# EAGLE board board-Panel (EAGLE 9.6.2)
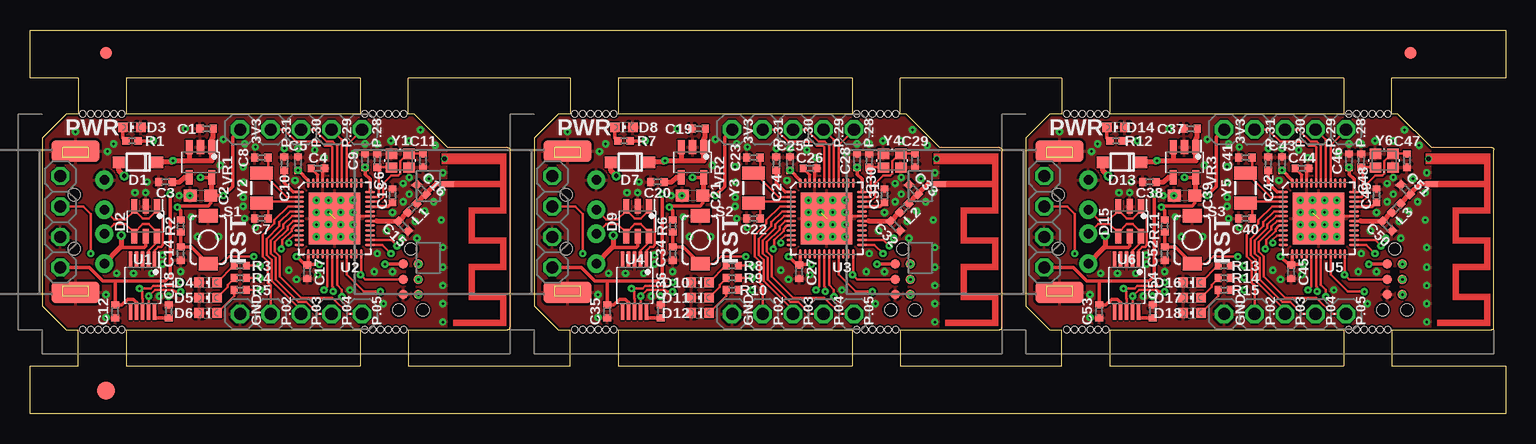
[diagram p0: board, top side]
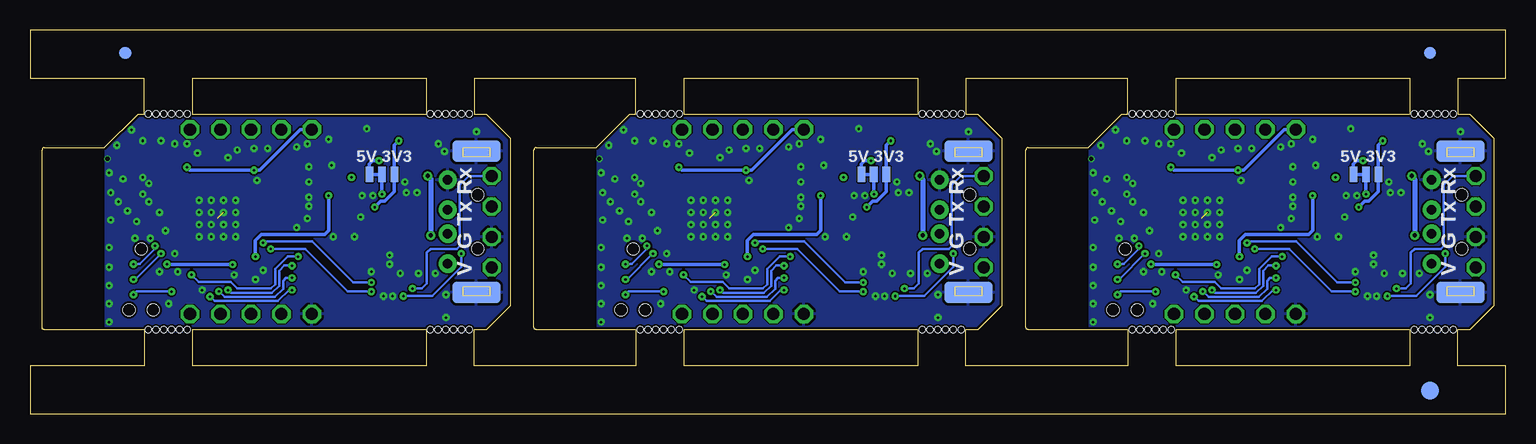
[diagram p1: board, bottom side, seen from below]

Size 123 x 32 mm. Coordinates in mm from the lower left corner, seen from the top.
Outline: 82,4 72.5,4 72.5,7 80.8,7 arc90 81,7.2 81,22 arc90 80.8,22.2 75.8,22.2 73,25 72.5,25 72.5,28 82,28
Outline: 82,0 41,0 0,0 0,4 4,4 4,7 3,7 1,9 1,23 3,25 4,25 4,28 0,28 0,32 41,32 82,32
Outline: 82,4 86,4 86,7 85,7 83,9 83,23 85,25 86,25 86,28 82,28
Outline: 82,0 123,0 123,4 113.5,4 113.5,7 121.8,7 arc90 122,7.2 122,22 arc90 121.8,22.2 116.8,22.2 114,25 113.5,25 113.5,28 123,28 123,32 82,32
Outline: 8,7 27.5,7 27.5,4 8,4 8,7
Outline: 31.5,7 39.8,7 arc90 40,7.2 40,22 arc90 39.8,22.2 34.8,22.2 32,25 31.5,25 31.5,28 41,28 45,28 45,25 44,25 42,23 42,9 44,7 45,7 45,4 41,4 31.5,4 31.5,7
Outline: 27.5,25 8,25 8,28 27.5,28 27.5,25
Outline: 49,7 68.5,7 68.5,4 49,4 49,7
Outline: 68.5,25 49,25 49,28 68.5,28 68.5,25
Outline: 90,7 109.5,7 109.5,4 90,4 90,7
Outline: 109.5,25 90,25 90,28 109.5,28 109.5,25
Copper layers (1*16): Top 0.035mm / dielectric 1.5mm / Bottom 0.035mm
Design rules "board": minimum track width 0.13208125mm, minimum drill 0.2mm, track to track 0.13208125mm, track to pad 0.13208125mm, pad to pad 0.13208125mm, via to via 0.13208125mm, smd to smd 0.13208125mm, copper to edge 8mil, drill to drill 3mil, minimum pad ring 3mil, minimum via ring 0.2mm, stop-mask expansion 4mil, vias tented up to drill 15mil, thermal gap 8mil
Net classes: 0 default: width 0.203 mm; 1 power: width 0.305 mm; 2 RF: width 0.406 mm
Holes 0.5 mm at 4.4,25 5.05,25 5.7,25 6.35,25 7,25 7.65,25 27.9,25 28.55,25 29.2,25 29.85,25 30.5,25 31.15,25 27.9,7 28.55,7 29.2,7 29.85,7 30.5,7 31.15,7 4.4,7 5.05,7 5.7,7 6.35,7 7,7 7.65,7 45.4,25 46.05,25 46.7,25 47.35,25 48,25 48.65,25 68.9,25 69.55,25 70.2,25 70.85,25 71.5,25 72.15,25 68.9,7 69.55,7 70.2,7 70.85,7 71.5,7 72.15,7 45.4,7 46.05,7 46.7,7 47.35,7 48,7 48.65,7 86.4,25 87.05,25 87.7,25 88.35,25 89,25 89.65,25 109.9,25 110.55,25 111.2,25 111.85,25 112.5,25 113.15,25 109.9,7 110.55,7 111.2,7 111.85,7 112.5,7 113.15,7 86.4,7 87.05,7 87.7,7 88.35,7 89,7 89.65,7

## Footprints (pad centres in the part's own frame; a part is rotated, then mirrored left to right if it is on the bottom)
C0402 = smd 0.6 x 0.65: 1 -0.551,0; 2 0.551,0
C0603 = smd 1.1 x 1: 1 -0.85,0; 2 0.85,0
SOD-123 = smd 0.988 x 0.95: A 1.6,0; C -1.6,0
SPT-23-6 = smd 1.209 x 0.51: 1 -1.253,0.95; 2 -1.253,0; 3 -1.253,-0.95; 4 1.253,-0.95; 5 1.253,0; 6 1.253,0.95
LED_0603 = smd 0.8 x 0.8: A 0.75,0; C -0.75,0
FIDUCIAL-1X2 = smd 1 x 1: 1 0,0
FIDUCIAL-1.5X3 = smd 1.5 x 1.5: 1 0,0
USB-A-H-RECT = drill 0.8 pad 1.524: D+ 2.4,1; D- 2.4,-1; GND 2.4,3.5; VBUS 2.4,-3.5 | smd 4 x 1.8: SHIELD@0 0,5.9; SHIELD@1 0,-5.9 | smd 4 x 1.8 bottom: SHIELD@2 0,5.9; SHIELD@3 0,-5.9 | hole 1: -0.1,2.25; -0.1,-2.25
1X04-NOSILK = drill 1.016 octagon: 1 -3.81,0; 2 -1.27,0; 3 1.27,0; 4 3.81,0
SMT-JUMPER_3_1-NC_TRACE_NO-SILK = smd 0.66 x 1.27: 1 -1.041,0; 2 0,0; 3 1.041,0
1X05-NOSILK = drill 1.016 octagon: 1 -5.08,0; 2 -2.54,0; 3 0,0; 4 2.54,0; 5 5.08,0
R0402 = smd 0.6 x 0.65: 1 -0.5,0; 2 0.5,0
TACTILE_SWITCH_SMD_3.0X4.0MM = smd 1.1 x 1.6: 1 -2,0; 2 2,0
TC2030-IDC-NL = smd 0.787 x 0.787: 1 -1.27,-0.635; 2 -1.27,0.635; 3 0,-0.635; 4 0,0.635; 5 1.27,-0.635; 6 1.27,0.635 | hole 0.991: -2.54,0; 2.54,1.016; 2.54,-1.016
MSOP-10 = smd 1.412 x 0.272: 1 -2.15,1; 2 -2.15,0.5; 3 -2.15,0; 4 -2.15,-0.5; 5 -2.15,-1; 6 2.15,-1; 7 2.15,-0.5; 8 2.15,0; 9 2.15,0.5; 10 2.15,1
QFN40P600X600X90-49T450N = smd 0.811 x 0.22: 1 -2.951,2.2; 2 -2.951,1.8; 3 -2.951,1.4; 4 -2.951,1; 5 -2.951,0.6; 6 -2.951,0.2; 7 -2.951,-0.2; 8 -2.951,-0.6; 9 -2.951,-1; 10 -2.951,-1.4; 11 -2.951,-1.8; 12 -2.951,-2.2; 25 2.951,-2.2; 26 2.951,-1.8; 27 2.951,-1.4; 28 2.951,-1; 29 2.951,-0.6; 30 2.951,-0.2; 31 2.951,0.2; 32 2.951,0.6; 33 2.951,1; 34 2.951,1.4; 35 2.951,1.8; 36 2.951,2.2 | smd 0.22 x 0.811: 13 -2.2,-2.951; 14 -1.8,-2.951; 15 -1.4,-2.951; 16 -1,-2.951; 17 -0.6,-2.951; 18 -0.2,-2.951; 19 0.2,-2.951; 20 0.6,-2.951; 21 1,-2.951; 22 1.4,-2.951; 23 1.8,-2.951; 24 2.2,-2.951; 37 2.2,2.951; 38 1.8,2.951; 39 1.4,2.951; 40 1,2.951; 41 0.6,2.951; 42 0.2,2.951; 43 -0.2,2.951; 44 -0.6,2.951; 45 -1,2.951; 46 -1.4,2.951; 47 -1.8,2.951; 48 -2.2,2.951 | smd 4.3 x 4.3: 49 0,0
TI-AN043_LEFT = drill 0.35: GND 0.45,0.25 | smd 0.508 x 1.016: RF 2.55,0.51
SOT-23-5 = smd 1.189 x 0.589: 1 -1.264,0.95; 2 -1.264,0; 3 -1.264,-0.95; 4 1.264,-0.95; 5 1.264,0.95
CRYSTAL-SMD-2.0X1.6MM = smd 0.95 x 0.85: 1 -0.725,-0.575; 2 0.725,-0.575; 3 0.725,0.575; 4 -0.725,0.575
CRYSTAL-SMD-3.2X1.5MM = smd 1.1 x 1.9: P$1 -1.25,0; P$2 1.25,0

## Placement (x,y rotation side)
C1  1uF  [C0402]  14.72,23.76 180 top
C2  2.2uF  [C0603]  14.21,18.18 180 top
C3  100nF  [C0402]  11.29,19.32 180 top
C4  100nF  [C0402]  23.99,20.46 0 top
C5  4.7uF  [C0402]  22.34,20.84 90 top
C6  12pF  [C0402]  28.94,21.1 90 top
C7  12pF  [C0402]  19.29,16.27 0 top
C8  12pF  [C0402]  19.29,21.35 0 top
C9  100nF  [C0402]  27.92,21.1 90 top
C10  100nF  [C0402]  21.19,20.84 90 top
C11  12pF  [C0402]  32.75,21.1 270 top
C12  100nF  [C0402]  7.1,8.52 270 top
C13  100pF  [C0402]  30.21,18.18 90 top
C14  1uF  [C0402]  12.56,13.35 270 top
C15  DNP  [C0402]  31.1,15.64 315 top
C16  DNP  [C0402]  32.62,18.68 135 top
C17  100nF  [C0402]  23.1,11.83 270 top
C18  100nF  [C0402]  11.56,8.52 90 top
C19  1uF  [C0402]  55.72,23.76 180 top
C20  100nF  [C0402]  52.29,19.32 180 top
C21  2.2uF  [C0603]  55.21,18.18 180 top
C22  12pF  [C0402]  60.29,16.27 0 top
C23  12pF  [C0402]  60.29,21.35 0 top
C24  100nF  [C0402]  62.19,20.84 90 top
C25  4.7uF  [C0402]  63.34,20.84 90 top
C26  100nF  [C0402]  64.99,20.46 0 top
C27  100nF  [C0402]  64.1,11.83 270 top
C28  100nF  [C0402]  68.92,21.1 90 top
C29  12pF  [C0402]  73.75,21.1 270 top
C30  12pF  [C0402]  69.94,21.1 90 top
C31  100pF  [C0402]  71.21,18.18 90 top
C32  DNP  [C0402]  72.1,15.64 315 top
C33  DNP  [C0402]  73.62,18.68 135 top
C34  1uF  [C0402]  53.56,13.35 270 top
C35  100nF  [C0402]  48.1,8.52 270 top
C36  100nF  [C0402]  52.56,8.52 90 top
C37  1uF  [C0402]  96.71,23.76 180 top
C38  100nF  [C0402]  93.29,19.32 180 top
C39  2.2uF  [C0603]  96.21,18.18 180 top
C40  12pF  [C0402]  101.29,16.27 0 top
C41  12pF  [C0402]  101.29,21.35 0 top
C42  100nF  [C0402]  103.19,20.84 90 top
C43  4.7uF  [C0402]  104.33,20.84 90 top
C44  100nF  [C0402]  105.99,20.46 0 top
C45  100nF  [C0402]  105.1,11.83 270 top
C46  100nF  [C0402]  109.92,21.1 90 top
C47  12pF  [C0402]  114.75,21.1 270 top
C48  12pF  [C0402]  110.94,21.1 90 top
C49  100pF  [C0402]  112.21,18.18 90 top
C50  DNP  [C0402]  113.1,15.64 315 top
C51  DNP  [C0402]  114.62,18.68 135 top
C52  1uF  [C0402]  94.56,13.35 270 top
C53  100nF  [C0402]  89.09,8.52 270 top
C54  100nF  [C0402]  93.56,8.52 90 top
D1  B5819W  [SOD-123]  9,20.97 180 top
D2  TVS  [SPT-23-6]  9.64,16.03 270 top
D3  PWR  [LED_0603]  8.49,23.89 180 top
D4  0603  [LED_0603]  14.84,10.94 0 top
D5  0603  [LED_0603]  14.84,9.67 0 top
D6  0603  [LED_0603]  14.84,8.4 0 top
D7  B5819W  [SOD-123]  50,20.97 180 top
D8  PWR  [LED_0603]  49.49,23.89 180 top
D9  TVS  [SPT-23-6]  50.64,16.03 270 top
D10  0603  [LED_0603]  55.84,10.94 0 top
D11  0603  [LED_0603]  55.84,9.67 0 top
D12  0603  [LED_0603]  55.84,8.4 0 top
D13  B5819W  [SOD-123]  91,20.97 180 top
D14  PWR  [LED_0603]  90.49,23.89 180 top
D15  TVS  [SPT-23-6]  91.63,16.03 270 top
D16  0603  [LED_0603]  96.84,10.94 0 top
D17  0603  [LED_0603]  96.84,9.67 0 top
D18  0603  [LED_0603]  96.84,8.4 0 top
E$1  [FIDUCIAL-1X2]  6.35,30.09 0 top
E$2  [FIDUCIAL-1X2]  6.35,30.09 0 bottom
E$3  [FIDUCIAL-1X2]  115.06,30.09 0 top
E$4  [FIDUCIAL-1X2]  115.06,30.09 0 bottom
E$5  [FIDUCIAL-1.5X3]  6.35,1.91 0 top
E$6  [FIDUCIAL-1.5X3]  6.35,1.91 0 bottom
J1  USB-A_PTH_MALE  [USB-A-H-RECT]  3.79,16 0 top
J2  USB-A_PTH_MALE  [USB-A-H-RECT]  44.79,16 0 top
J3  USB-A_PTH_MALE  [USB-A-H-RECT]  85.79,16 0 top
JP1  V G Tx Rx  [1X04-NOSILK]  2.52,16 90 top
JP2  5V 3V3  [SMT-JUMPER_3_1-NC_TRACE_NO-SILK]  11.67,19.95 180 bottom
JP3  [1X05-NOSILK]  22.59,23.7 0 top
JP4  [1X05-NOSILK]  22.59,8.3 0 top
JP5  V G Tx Rx  [1X04-NOSILK]  43.52,16 90 top
JP6  5V 3V3  [SMT-JUMPER_3_1-NC_TRACE_NO-SILK]  52.67,19.95 180 bottom
JP7  [1X05-NOSILK]  63.59,23.7 0 top
JP8  [1X05-NOSILK]  63.59,8.3 0 top
JP9  V G Tx Rx  [1X04-NOSILK]  84.52,16 90 top
JP10  5V 3V3  [SMT-JUMPER_3_1-NC_TRACE_NO-SILK]  93.67,19.95 180 bottom
JP11  [1X05-NOSILK]  104.59,23.7 0 top
JP12  [1X05-NOSILK]  104.59,8.3 0 top
L1  0R  [R0402]  31.86,17.16 45 top
L2  0R  [R0402]  72.86,17.16 45 top
L3  0R  [R0402]  113.86,17.16 45 top
R1  15k  [R0402]  8.49,22.75 0 top
R2  10k  [R0402]  12.56,15.64 90 top
R3  10k  [R0402]  17.51,12.33 180 top
R4  10k  [R0402]  17.51,11.32 180 top
R5  10k  [R0402]  17.51,10.3 180 top
R6  10k  [R0402]  53.56,15.64 90 top
R7  15k  [R0402]  49.49,22.75 0 top
R8  10k  [R0402]  58.51,12.33 180 top
R9  10k  [R0402]  58.51,11.32 180 top
R10  10k  [R0402]  58.51,10.3 180 top
R11  10k  [R0402]  94.56,15.64 90 top
R12  15k  [R0402]  90.49,22.75 0 top
R13  10k  [R0402]  99.51,12.33 180 top
R14  10k  [R0402]  99.51,11.32 180 top
R15  10k  [R0402]  99.51,10.3 180 top
S1  SPST-3x4mm  [TACTILE_SWITCH_SMD_3.0X4.0MM]  14.84,14.49 270 top
S2  SPST-3x4mm  [TACTILE_SWITCH_SMD_3.0X4.0MM]  55.84,14.49 270 top
S3  SPST-3x4mm  [TACTILE_SWITCH_SMD_3.0X4.0MM]  96.84,14.49 270 top
TC1  TC2030-IDC-NL  [TC2030-IDC-NL]  31.73,11.19 270 top
TC2  TC2030-IDC-NL  [TC2030-IDC-NL]  72.73,11.19 270 top
TC3  TC2030-IDC-NL  [TC2030-IDC-NL]  113.73,11.19 270 top
U1  CH340E  [MSOP-10]  9.38,10.68 270 top
U2  NRF52832  [QFN40P600X600X90-49T450N]  25.38,16.27 0 top
U3  NRF52832  [QFN40P600X600X90-49T450N]  66.38,16.27 0 top
U4  CH340E  [MSOP-10]  50.38,10.68 270 top
U5  NRF52832  [QFN40P600X600X90-49T450N]  107.38,16.27 0 top
U6  CH340E  [MSOP-10]  91.38,10.68 270 top
U$1  ANT  [TI-AN043_LEFT]  34.3,21.7 270 top
U$2  ANT  [TI-AN043_LEFT]  75.3,21.7 270 top
U$3  ANT  [TI-AN043_LEFT]  116.3,21.7 270 top
VR1  AP2210K-3.3TRG  [SOT-23-5]  14.21,20.97 270 top
VR2  AP2210K-3.3TRG  [SOT-23-5]  55.21,20.97 270 top
VR3  AP2210K-3.3TRG  [SOT-23-5]  96.21,20.97 270 top
Y1  32MHz_2016  [CRYSTAL-SMD-2.0X1.6MM]  30.84,21.1 180 top
Y2  32.768kHz  [CRYSTAL-SMD-3.2X1.5MM]  19.29,18.81 90 top
Y3  32.768kHz  [CRYSTAL-SMD-3.2X1.5MM]  60.29,18.81 90 top
Y4  32MHz_2016  [CRYSTAL-SMD-2.0X1.6MM]  71.85,21.1 180 top
Y5  32.768kHz  [CRYSTAL-SMD-3.2X1.5MM]  101.29,18.81 90 top
Y6  32MHz_2016  [CRYSTAL-SMD-2.0X1.6MM]  112.84,21.1 180 top

## Library data of the parts
C1 C14 C19 C34 C37 C52 = angrypig7-RCL; LCSC: C52923; SPICEPREFIX: C
C2 C21 C39 = angrypig7-RCL; LCSC: C23630; SPICEPREFIX: C
C3 C4 C9 C10 C12 C17 C18 C20 C24 C26-C28 C35 C36 C38 C42 C44-C46 C53 C54 = angrypig7-RCL; LCSC: C1525; SPICEPREFIX: C
C5 C25 C43 = angrypig7-RCL; LCSC: C23733; SPICEPREFIX: C
C6-C8 C11 C22 C23 C29 C30 C40 C41 C47 C48 = angrypig7-RCL; LCSC: C1547; SPICEPREFIX: C
C13 C31 C49 = angrypig7-RCL; LCSC: C1546; SPICEPREFIX: C
C15 C16 C32 C33 C50 C51 = angrypig7-RCL; SPICEPREFIX: C
D1 D7 D13 = angrypig7-Diodes; LCSC: C8598
D2 D9 D15 = angrypig7-Diodes; JLC_ROTATION: 180; LCSC: C85364
D3 D8 D14 = angrypig7-Diodes; LCSC: C72038
D4-D6 D10-D12 D16-D18 = angrypig7-Diodes; LCSC: C2286
E$1-E$4 = SparkFun-Aesthetics
E$5 E$6 = SparkFun-Retired
J1-J3 = angrypig7-Connectors-USB; LCSC: C98125
JP1 JP3-JP5 JP7-JP9 JP11 JP12 = angrypig7-Connectors-PinHeads
JP2 JP6 JP10 = angrypig7-Jumpers
L1-L3 = angrypig7-RCL; LCSC: C17168
R1 R7 R12 = angrypig7-RCL; LCSC: C25756; SPICEPREFIX: R
R2-R6 R8-R11 R13-R15 = angrypig7-RCL; LCSC: C25744; SPICEPREFIX: R
S1-S3 = angrypig7-Switches; LCSC: C720477
TC1-TC3 = angrypig7-Connectors-Programming
U1 U4 U6 = angrypig7-IC; JLC_ROTATION: 270; LCSC: C99652
U2 U3 U5 = angrypig7-IC-MCU; JLC_ROTATION: 270; LCSC: C77540
U$1-U$3 = angrypig7-Antennas
VR1-VR3 = angrypig7-IC-Power; JLC_ROTATION: 180; LCSC: C176959
Y1 Y4 Y6 = angrypig7-Clocks; LCSC: C255896
Y2 Y3 Y5 = angrypig7-Clocks; LCSC: C32346

## Nets
3V1 [power]: C21.1 C25.1 C27.1 C28.1 JP6.1 JP7.1 R6.2 R7.2 TC2.1 U3.13 U3.36 U3.48 VR2.5
3V2 [power]: C39.1 C43.1 C45.1 C46.1 JP10.1 JP11.1 R11.2 R12.2 TC3.1 U5.13 U5.36 U5.48 VR3.5
3V3 [power]: C2.1 C5.1 C9.1 C17.1 JP2.1 JP3.1 R1.2 R2.2 TC1.1 U2.13 U2.36 U2.48 VR1.5
5V: C1.1 D1.C JP2.3 VR1.1 VR1.3
5V1: C19.1 D7.C JP6.3 VR2.1 VR2.3
5V2: C37.1 D13.C JP10.3 VR3.1 VR3.3
GND [power]: C1.2 C2.2 C3.2 C4.2 C5.2 C6.2 C7.1 C8.1 C9.2 C10.2 C11.2 C12.2 C13.2 C14.2 C15.2 C16.2 C17.2 C18.2 D2.2 D3.C D4.C D5.C D6.C J1.GND J1.SHIELD@0 J1.SHIELD@1 J1.SHIELD@2 J1.SHIELD@3 JP1.2 JP4.1 S1.1 TC1.5 U1.3 U2.31 U2.45 U2.49 U$1.GND VR1.2 Y1.2 Y1.4
GND1 [power]: C19.2 C20.2 C21.2 C22.1 C23.1 C24.2 C25.2 C26.2 C27.2 C28.2 C29.2 C30.2 C31.2 C32.2 C33.2 C34.2 C35.2 C36.2 D8.C D9.2 D10.C D11.C D12.C J2.GND J2.SHIELD@0 J2.SHIELD@1 J2.SHIELD@2 J2.SHIELD@3 JP5.2 JP8.1 S2.1 TC2.5 U3.31 U3.45 U3.49 U4.3 U$2.GND VR2.2 Y4.2 Y4.4
GND2 [power]: C37.2 C38.2 C39.2 C40.1 C41.1 C42.2 C43.2 C44.2 C45.2 C46.2 C47.2 C48.2 C49.2 C50.2 C51.2 C52.2 C53.2 C54.2 D14.C D15.2 D16.C D17.C D18.C J3.GND J3.SHIELD@0 J3.SHIELD@1 J3.SHIELD@2 J3.SHIELD@3 JP9.2 JP12.1 S3.1 TC3.5 U5.31 U5.45 U5.49 U6.3 U$3.GND VR3.2 Y6.2 Y6.4
LED1: R3.1 U2.17
LED2: R4.1 U2.18
LED3: R5.1 U2.19
LED4: R8.1 U3.17
LED5: R9.1 U3.18
LED6: R10.1 U3.19
LED7: R13.1 U5.17
LED8: R14.1 U5.18
LED9: R15.1 U5.19
N$1: C8.2 U2.2 Y2.P$2
N$2: D4.A R3.2
N$3 [power]: C3.1 VR1.4
N$4: C7.2 U2.3 Y2.P$1
N$5 [power]: C10.1 U2.1
N$6: D3.A R1.1
N$7 [power]: C4.1 U2.46
N$8: C6.1 U2.35 Y1.3
N$9: C11.1 U2.34 Y1.1
N$10 [power]: C13.1 U2.33
N$11: U2.32
N$12: D5.A R4.2
N$13 [power]: C20.1 VR2.4
N$14: D6.A R5.2
N$15: C23.2 U3.2 Y3.P$2
N$16 [power]: C18.1 U1.10
N$17: C22.2 U3.3 Y3.P$1
N$18 [power]: C24.1 U3.1
N$19 [power]: C26.1 U3.46
N$20: C30.1 U3.35 Y4.3
N$21: C29.1 U3.34 Y4.1
N$22 [power]: C31.1 U3.33
N$23: U3.32
N$24: D8.A R7.1
N$25 [power]: C36.1 U4.10
N$26: D10.A R8.2
N$27: D11.A R9.2
N$28: D12.A R10.2
N$29 [power]: C38.1 VR3.4
N$30: C41.2 U5.2 Y5.P$2
N$31: C40.2 U5.3 Y5.P$1
N$32 [power]: C42.1 U5.1
N$33 [power]: C44.1 U5.46
N$34: C48.1 U5.35 Y6.3
N$35: C47.1 U5.34 Y6.1
N$36 [power]: C49.1 U5.33
N$37: U5.32
N$38: D14.A R12.1
N$39 [power]: C54.1 U6.10
N$40: D16.A R13.2
N$41: D17.A R14.2
N$42: D18.A R15.2
NRST: C14.1 R2.1 S1.2 TC1.3 U2.24
NRST1: C34.1 R6.1 S2.2 TC2.3 U3.24
NRST2: C52.1 R11.1 S3.2 TC3.3 U5.24
P0.01: JP8.2 U3.4
P0.02: JP4.2 U2.4
P0.03: JP4.3 U2.5
P0.04: JP4.4 U2.6
P0.05: JP4.5 U2.7
P0.06: JP7.2 U3.43
P0.07: JP7.3 U3.42
P0.08: JP7.4 U3.41
P0.09: JP7.5 U3.40
P0.10: JP8.3 U3.5
P0.11: JP8.4 U3.6
P0.12: JP8.5 U3.7
P0.13: JP12.2 U5.4
P0.14: JP11.2 U5.43
P0.15: JP11.3 U5.42
P0.16: JP11.4 U5.41
P0.17: JP11.5 U5.40
P0.18: JP12.3 U5.5
P0.19: JP12.4 U5.6
P0.20: JP12.5 U5.7
P0.28: JP3.5 U2.40
P0.29: JP3.4 U2.41
P0.30: JP3.3 U2.42
P0.31: JP3.2 U2.43
RF-1 [RF]: C15.1 L1.1 U2.30
RF-2 [RF]: C16.1 L1.2 U$1.RF
RF-3 [RF]: C33.1 L2.2 U$2.RF
RF-4 [RF]: C32.1 L2.1 U3.30
RF-5 [RF]: C51.1 L3.2 U$3.RF
RF-6 [RF]: C50.1 L3.1 U5.30
SWDCLK: TC1.4 U2.25
SWDCLK1: TC2.4 U3.25
SWDCLK2: TC3.4 U5.25
SWDIO: TC1.2 U2.26
SWDIO1: TC2.2 U3.26
SWDIO2: TC3.2 U5.26
SWO: TC1.6 U2.21
SWO1: TC2.6 U3.21
SWO2: TC3.6 U5.21
UART_RX: JP1.4 U1.8 U2.10
UART_RX1: JP5.4 U3.10 U4.8
UART_RX2: JP9.4 U5.10 U6.8
UART_TX: JP1.3 U1.9 U2.8
UART_TX1: JP5.3 U3.8 U4.9
UART_TX2: JP9.3 U5.8 U6.9
USB_IN [power]: D1.A D2.5 J1.VBUS
USB_IN1 [power]: D7.A D9.5 J2.VBUS
USB_IN2 [power]: D13.A D15.5 J3.VBUS
USB_N: D2.4 D2.6 J1.D- U1.2
USB_N1: D9.4 D9.6 J2.D- U4.2
USB_N2: D15.4 D15.6 J3.D- U6.2
USB_P: D2.1 D2.3 J1.D+ U1.1
USB_P1: D9.1 D9.3 J2.D+ U4.1
USB_P2: D15.1 D15.3 J3.D+ U6.1
VCCIO [power]: C12.1 JP1.1 JP2.2 U1.7
VCCIO1 [power]: C35.1 JP5.1 JP6.2 U4.7
VCCIO2 [power]: C53.1 JP9.1 JP10.2 U6.7

## Tracks (layer width: path | path; a pad name or v marks a point on that pad's centre or on a via)
3V1  (via drill 0.2)
  Top 0.254: 64.18,19.44 U3.48
  Top 0.305: v55.21,19.7 VR2.5 | R6.2 53.56,16.93 v53.27,17.22 53.38,17.33 55.84,17.33 56.06,17.54 C21.1 | U3.36 69.34,19.54 68.92,19.95 C28.1 | TC2.1 v70.58,12.46 | JP7.1 57.88,23.06 57.88,18.94 v57.11,18.18 56.26,18.18 56.16,18.28 | C25.1 64.18,19.44 | v51.27,22.75 R7.2 | v65.11,12.43 64.15,12.43 C27.1 | U3.13 64.18,12.46 C27.1 | C27.1 63.93,12.38 v63.21,13.1
  Top 0.406: C21.1 56.16,18.28 VR2.5
  Bottom 0.305: v70.58,12.46 70.55,12.43 v65.11,12.43 | JP7.1 59.46,23.7 62.87,20.29 C25.1 68.67,20.29 C28.1 | v57.11,18.18 57.11,15.25 57.44,14.92 62.72,14.92 63.21,14.43 v63.21,13.1 | v53.27,17.22 52.77,17.72 52.43,17.72 51.63,18.52 JP6.1 51.63,22.39 v51.27,22.75
  other vias: 63.34,20.29 68.92,20.55
3V2  (via drill 0.2)
  Top 0.254: 105.18,19.44 U5.48
  Top 0.305: v96.21,19.7 VR3.5 | R11.2 94.56,16.93 v94.27,17.22 94.38,17.33 96.84,17.33 97.06,17.54 C39.1 | U5.36 110.33,19.54 109.92,19.95 C46.1 | TC3.1 v111.57,12.46 | JP11.1 98.87,23.06 98.87,18.94 v98.11,18.18 97.26,18.18 97.16,18.28 | C43.1 105.18,19.44 | v92.27,22.75 R12.2 | v106.11,12.43 105.15,12.43 C45.1 | U5.13 105.18,12.46 C45.1 | C45.1 104.93,12.38 v104.21,13.1
  Top 0.406: C39.1 97.16,18.28 VR3.5
  Bottom 0.305: v111.57,12.46 111.54,12.43 v106.11,12.43 | JP11.1 100.46,23.7 103.87,20.29 C43.1 109.67,20.29 C46.1 | v98.11,18.18 98.11,15.25 98.44,14.92 103.71,14.92 104.21,14.43 v104.21,13.1 | v94.27,17.22 93.77,17.72 93.42,17.72 92.63,18.52 JP10.1 92.63,22.39 v92.27,22.75
  other vias: 104.33,20.29 109.92,20.55
3V3  (via drill 0.2)
  Top 0.254: 23.18,19.44 U2.48
  Top 0.305: v14.21,19.7 VR1.5 | R2.2 12.56,16.93 v12.27,17.22 12.38,17.33 14.84,17.33 15.06,17.54 C2.1 | U2.36 28.33,19.54 27.92,19.95 C9.1 | TC1.1 v29.58,12.46 | JP3.1 16.88,23.06 16.88,18.94 v16.11,18.18 15.26,18.18 15.16,18.28 | C5.1 23.18,19.44 | v10.27,22.75 R1.2 | v24.11,12.43 23.15,12.43 C17.1 | U2.13 23.18,12.46 C17.1 | C17.1 22.93,12.38 v22.21,13.1
  Top 0.406: C2.1 15.16,18.28 VR1.5
  Bottom 0.305: v29.58,12.46 29.55,12.43 v24.11,12.43 | JP3.1 18.46,23.7 21.87,20.29 C5.1 27.67,20.29 C9.1 | v16.11,18.18 16.11,15.25 16.44,14.92 21.72,14.92 22.21,14.43 v22.21,13.1 | v12.27,17.22 11.77,17.72 11.43,17.72 10.63,18.52 JP2.1 10.63,22.39 v10.27,22.75
  other vias: 22.34,20.29 27.92,20.55
5V  (via drill 0.2)
  Top 0.406: VR1.3 13.26,21.1 | D1.C 11.8,20.97 v11.92,21.1 13.26,21.1 | 13.26,21.1 15.16,21.1 VR1.1 15.16,22.94 15.27,23.04 C1.1
  Bottom 0.305: JP2.3 12.71,20.82 12.43,21.1 v11.92,21.1
5V1  (via drill 0.2)
  Top 0.406: VR2.3 54.26,21.1 | D7.C 52.8,20.97 v52.92,21.1 54.26,21.1 | 54.26,21.1 56.16,21.1 VR2.1 56.16,22.94 56.27,23.04 C19.1
  Bottom 0.305: JP6.3 53.71,20.82 53.43,21.1 v52.92,21.1
5V2  (via drill 0.2)
  Top 0.406: VR3.3 95.26,21.1 | D13.C 93.79,20.97 v93.92,21.1 95.26,21.1 | 95.26,21.1 97.16,21.1 VR3.1 97.16,22.94 97.27,23.04 C37.1
  Bottom 0.305: JP10.3 94.71,20.82 94.43,21.1 v93.92,21.1
GND  (via drill 0.2)  (1 unrouted)
  Top 0.229: U2.31 27.22,16.47
  Top 0.254: U2.45 24.38,20.31
  Top 0.305: 24.38,20.31 C4.2
  Top 0.406: 27.22,16.47 v26.91,16.78
  other vias: 12.56,11.83 11.03,12.46 11.03,13.22 8.62,11.7 10.14,11.7 10.78,9.79 6.33,9.92 6.33,8.02 9.64,18.43 8.75,18.43 15.86,20.72 16.11,22.88 12.94,23.76 9.76,19.32 13.45,16.4 13.95,14.75 15.73,14.75 6.97,22.49 11.54,9.79 21.19,22.11 22.34,22.11 24.49,21.35 34.4,7.63 34.4,9.16 34.4,10.68 34.4,12.21 34.4,13.86 34.27,16.14 34.27,18.43 34.4,20.08 32.54,23.66 25.89,17.8 24.88,17.8 23.86,17.8 26.91,17.8 25.89,14.75 24.88,14.75 23.86,14.75 26.91,14.75 25.89,15.76 24.88,15.76 23.86,15.76 26.91,15.76 25.89,16.78 24.88,16.78 23.86,16.78 31.1,19.19 33.26,19.57 27.92,22.49 27.04,21.73 28.94,22.49 30.08,22.75 31.61,22.75 29.45,9.16 26.65,10.3 17.89,16.27 18.78,15.51 18.78,22.24 17.76,20.59 17.76,19.32 17.76,18.05 17.76,17.29 31.61,19.7 31.1,17.67 29.7,15.26 33.64,17.67 23.73,21.99 28.94,13.35 30.21,11.83 28.69,11.83 33.77,22.37 3.79,23.51 6.46,21.86 32.12,16.02 30.21,16.78 31.61,18.3 32.88,16.91 30.97,14.62 32.24,14.62 22.08,19.45 17.89,22.49 7.22,11.7 22.21,11.19 23.99,11.57 21.57,11.95 12.43,18.18 13.32,18.18
  pour Top (rank 6): 1,25 40,25 40,7 1,7
  pour Bottom (rank 6): 1,25 40,25 40,7 1,7
GND1  (via drill 0.2)  (1 unrouted)
  Top 0.229: U3.31 68.22,16.47
  Top 0.254: U3.45 65.38,20.31
  Top 0.305: 65.38,20.31 C26.2
  Top 0.406: 68.22,16.47 v67.91,16.78
  other vias: 53.56,11.83 52.03,12.46 52.03,13.22 49.62,11.7 51.14,11.7 51.78,9.79 47.33,9.92 47.33,8.02 50.64,18.43 49.75,18.43 56.86,20.72 57.11,22.88 53.94,23.76 50.76,19.32 54.45,16.4 54.95,14.75 56.73,14.75 47.97,22.49 52.54,9.79 62.19,22.11 63.34,22.11 65.5,21.35 75.4,7.63 75.4,9.16 75.4,10.68 75.4,12.21 75.4,13.86 75.27,16.14 75.27,18.43 75.4,20.08 73.54,23.66 66.89,17.8 65.88,17.8 64.86,17.8 67.91,17.8 66.89,14.75 65.88,14.75 64.86,14.75 67.91,14.75 66.89,15.76 65.88,15.76 64.86,15.76 67.91,15.76 66.89,16.78 65.88,16.78 64.86,16.78 72.1,19.19 74.26,19.57 68.92,22.49 68.04,21.73 69.94,22.49 71.08,22.75 72.61,22.75 70.45,9.16 67.65,10.3 58.89,16.27 59.78,15.51 59.78,22.24 58.76,20.59 58.76,19.32 58.76,18.05 58.76,17.29 72.61,19.7 72.1,17.67 70.7,15.26 74.64,17.67 64.73,21.99 69.94,13.35 71.21,11.83 69.69,11.83 74.77,22.37 44.79,23.51 47.46,21.86 73.12,16.02 71.21,16.78 72.61,18.3 73.88,16.91 71.97,14.62 73.24,14.62 63.08,19.45 58.89,22.49 48.22,11.7 63.21,11.19 64.99,11.57 62.57,11.95 53.43,18.18 54.32,18.18
  pour Top (rank 6): 42,25 81,25 81,7 42,7
  pour Bottom (rank 6): 42,25 81,25 81,7 42,7
GND2  (via drill 0.2)  (1 unrouted)
  Top 0.229: U5.31 109.22,16.47
  Top 0.254: U5.45 106.38,20.31
  Top 0.305: 106.38,20.31 C44.2
  Top 0.406: 109.22,16.47 v108.91,16.78
  other vias: 94.56,11.83 93.03,12.46 93.03,13.22 90.62,11.7 92.14,11.7 92.78,9.79 88.33,9.92 88.33,8.02 91.63,18.43 90.75,18.43 97.86,20.72 98.11,22.88 94.94,23.76 91.76,19.32 95.44,16.4 95.95,14.75 97.73,14.75 88.97,22.49 93.54,9.79 103.19,22.11 104.33,22.11 106.49,21.35 116.4,7.63 116.4,9.16 116.4,10.68 116.4,12.21 116.4,13.86 116.27,16.14 116.27,18.43 116.4,20.08 114.54,23.66 107.89,17.8 106.87,17.8 105.86,17.8 108.91,17.8 107.89,14.75 106.87,14.75 105.86,14.75 108.91,14.75 107.89,15.76 106.87,15.76 105.86,15.76 108.91,15.76 107.89,16.78 106.87,16.78 105.86,16.78 113.1,19.19 115.26,19.57 109.92,22.49 109.03,21.73 110.94,22.49 112.08,22.75 113.61,22.75 111.45,9.16 108.65,10.3 99.89,16.27 100.78,15.51 100.78,22.24 99.76,20.59 99.76,19.32 99.76,18.05 99.76,17.29 113.61,19.7 113.1,17.67 111.7,15.26 115.64,17.67 105.73,21.99 110.94,13.35 112.21,11.83 110.68,11.83 115.76,22.37 85.79,23.51 88.46,21.86 114.11,16.02 112.21,16.78 113.61,18.3 114.88,16.91 112.97,14.62 114.24,14.62 104.08,19.45 99.89,22.49 89.22,11.7 104.21,11.19 105.99,11.57 103.57,11.95 94.43,18.18 95.32,18.18
  pour Top (rank 6): 83,25 122,25 122,7 83,7
  pour Bottom (rank 6): 83,25 122,25 122,7 83,7
GND-CUTOUT
  cutout Top: 40,25 34.8,25 34.8,7 40,7
GND-CUTOUT1
  cutout Top: 81,25 75.8,25 75.8,7 81,7
GND-CUTOUT2
  cutout Bottom: 40,25 34.8,25 34.8,7 40,7
GND-CUTOUT3
  cutout Bottom: 81,25 75.8,25 75.8,7 81,7
GND-CUTOUT4
  cutout Top: 122,25 116.8,25 116.8,7 122,7
GND-CUTOUT5
  cutout Bottom: 122,25 116.8,25 116.8,7 122,7
LED1  (via drill 0.2)
  Top 0.203: R3.1 v19.16,12.33 | U2.17 24.78,10.59 v24.5,10.3
  Bottom 0.203: v19.16,12.33 19.8,12.33 20.24,11.89 20.24,10.65 20.84,10.05 24.24,10.05 v24.5,10.3
LED2  (via drill 0.2)
  Top 0.203: R4.1 v19.16,11.32 | U2.18 25.18,10.62 25.28,10.52 25.28,10.21 v25.27,10.19
  Bottom 0.203: v19.16,11.32 19.67,11.32 19.91,11.08 19.91,10.41 20.61,9.71 24.79,9.71 v25.27,10.19
LED3  (via drill 0.2)
  Top 0.203: R5.1 v19.16,10.3 | U2.19 25.58,10.73 25.99,10.32 v25.99,9.75
  Bottom 0.203: v25.99,9.75 25.62,9.38 20.34,9.38 19.42,10.3 v19.16,10.3
LED4  (via drill 0.2)
  Top 0.203: R8.1 v60.16,12.33 | U3.17 65.78,10.59 v65.5,10.3
  Bottom 0.203: v60.16,12.33 60.8,12.33 61.24,11.89 61.24,10.65 61.84,10.05 65.24,10.05 v65.5,10.3
LED5  (via drill 0.2)
  Top 0.203: R9.1 v60.16,11.32 | U3.18 66.18,10.62 66.28,10.52 66.28,10.21 v66.27,10.19
  Bottom 0.203: v60.16,11.32 60.67,11.32 60.91,11.08 60.91,10.41 61.61,9.71 65.79,9.71 v66.27,10.19
LED6  (via drill 0.2)
  Top 0.203: R10.1 v60.16,10.3 | U3.19 66.58,10.73 66.99,10.32 v66.99,9.75
  Bottom 0.203: v66.99,9.75 66.62,9.38 61.34,9.38 60.42,10.3 v60.16,10.3
LED7  (via drill 0.2)
  Top 0.203: R13.1 v101.16,12.33 | U5.17 106.78,10.59 v106.49,10.3
  Bottom 0.203: v101.16,12.33 101.8,12.33 102.24,11.89 102.24,10.65 102.84,10.05 106.24,10.05 v106.49,10.3
LED8  (via drill 0.2)
  Top 0.203: R14.1 v101.16,11.32 | U5.18 107.18,10.62 107.28,10.52 107.28,10.21 v107.27,10.19
  Bottom 0.203: v101.16,11.32 101.67,11.32 101.91,11.08 101.91,10.41 102.6,9.71 106.79,9.71 v107.27,10.19
LED9  (via drill 0.2)
  Top 0.203: R15.1 v101.16,10.3 | U5.19 107.58,10.73 107.99,10.32 v107.99,9.75
  Bottom 0.203: v107.99,9.75 107.61,9.38 102.34,9.38 101.41,10.3 v101.16,10.3
N$1
  Top 0.203: U2.2 21.41,18.07 19.42,20.06 Y2.P$2 19.84,20.61 C8.2
N$2
  Top 0.203: D4.A 16.99,12.33 R3.2
N$3
  Top 0.406: C3.1 12.49,19.32 12.88,19.71 VR1.4
N$4
  Top 0.203: U2.3 19.4,17.67 Y2.P$1 19.84,17.01 C7.2
N$5
  Top 0.254: U2.1 21.93,18.47
  Top 0.305: C10.1 21.19,19.21 21.93,18.47
N$6
  Top 0.305: R1.1 7.74,23 D3.A
N$7
  Top 0.254: U2.46 23.98,19.91 C4.1
N$8
  Top 0.203: U2.35 28.96,18.07 29.07,18.18 29.07,20.42 C6.1 30.1,20.55 Y1.3
N$9
  Top 0.203: C11.1 32.73,21.67 Y1.1 31.49,21.67 30.86,21.04 30.86,20.03 30.69,19.86 30.12,19.86 29.45,19.19 29.45,18.08 29.04,17.67 U2.34
N$10
  Top 0.254: U2.33 29.17,17.27
  Top 0.305: 29.17,17.27 29.86,17.27 C13.1
N$12
  Top 0.203: D5.A 16.48,10.55 16.48,10.72 17.01,11.26 R4.2
N$13
  Top 0.406: C20.1 53.49,19.32 53.88,19.71 VR2.4
N$14
  Top 0.203: D6.A 17.01,9.81 R5.2
N$15
  Top 0.203: U3.2 62.41,18.07 60.42,20.06 Y3.P$2 60.84,20.61 C23.2
N$16
  Top 0.305: C18.1 10.45,7.97 10.38,8.03 U1.10
N$17
  Top 0.203: U3.3 60.4,17.67 Y3.P$1 60.84,17.01 C22.2
N$18
  Top 0.254: U3.1 62.93,18.47
  Top 0.305: C24.1 62.19,19.21 62.93,18.47
N$19
  Top 0.254: U3.46 64.98,19.91 C26.1
N$20
  Top 0.203: U3.35 69.96,18.07 70.07,18.18 70.07,20.42 C30.1 71.1,20.55 Y4.3
N$21
  Top 0.203: C29.1 73.73,21.67 Y4.1 72.49,21.67 71.86,21.04 71.86,20.03 71.69,19.86 71.12,19.86 70.45,19.19 70.45,18.08 70.04,17.67 U3.34
N$22
  Top 0.254: U3.33 70.17,17.27
  Top 0.305: 70.17,17.27 70.86,17.27 C31.1
N$24
  Top 0.305: R7.1 48.74,23 D8.A
N$25
  Top 0.305: C36.1 51.45,7.97 51.38,8.03 U4.10
N$26
  Top 0.203: D10.A 57.99,12.33 R8.2
N$27
  Top 0.203: D11.A 57.48,10.55 57.48,10.72 58.01,11.26 R9.2
N$28
  Top 0.203: D12.A 58.01,9.81 R10.2
N$29
  Top 0.406: C38.1 94.49,19.32 94.88,19.71 VR3.4
N$30
  Top 0.203: U5.2 103.4,18.07 101.41,20.06 Y5.P$2 101.84,20.61 C41.2
N$31
  Top 0.203: U5.3 101.4,17.67 Y5.P$1 101.84,17.01 C40.2
N$32
  Top 0.254: U5.1 103.93,18.47
  Top 0.305: C42.1 103.19,19.21 103.93,18.47
N$33
  Top 0.254: U5.46 105.98,19.91 C44.1
N$34
  Top 0.203: U5.35 110.96,18.07 111.07,18.18 111.07,20.42 C48.1 112.09,20.55 Y6.3
N$35
  Top 0.203: C47.1 114.72,21.67 Y6.1 113.49,21.67 112.86,21.04 112.86,20.03 112.69,19.86 112.12,19.86 111.45,19.19 111.45,18.08 111.04,17.67 U5.34
N$36
  Top 0.254: U5.33 111.17,17.27
  Top 0.305: 111.17,17.27 111.85,17.27 C49.1
N$38
  Top 0.305: R12.1 89.74,23 D14.A
N$39
  Top 0.305: C54.1 92.45,7.97 92.38,8.03 U6.10
N$40
  Top 0.203: D16.A 98.99,12.33 R13.2
N$41
  Top 0.203: D17.A 98.48,10.55 98.48,10.72 99.01,11.26 R14.2
N$42
  Top 0.203: D18.A 99.01,9.81 R15.2
NRST  (via drill 0.2)
  Top 0.203: S1.2 15.99,12.49 16.59,13.1 v18.65,13.1 | U2.24 27.58,11.61 v27.54,11.57 27.92,11.19 TC1.3
  Top 0.305: S1.2 13.44,13.9 C14.1 R2.1
  Bottom 0.203: v18.65,13.1 19.54,13.1 20.58,12.05 20.58,10.79 20.94,10.43 23.74,10.43 24.27,10.96 26.93,10.96 v27.54,11.57
NRST1  (via drill 0.2)
  Top 0.203: S2.2 56.99,12.49 57.59,13.1 v59.65,13.1 | U3.24 68.58,11.61 v68.54,11.57 68.92,11.19 TC2.3
  Top 0.305: S2.2 54.44,13.9 C34.1 R6.1
  Bottom 0.203: v59.65,13.1 60.54,13.1 61.58,12.05 61.58,10.79 61.94,10.43 64.74,10.43 65.27,10.96 67.93,10.96 v68.54,11.57
NRST2  (via drill 0.2)
  Top 0.203: S3.2 97.99,12.49 98.59,13.1 v100.65,13.1 | U5.24 109.58,11.61 v109.54,11.57 109.92,11.19 TC3.3
  Top 0.305: S3.2 95.43,13.9 C52.1 R11.1
  Bottom 0.203: v100.65,13.1 101.53,13.1 102.58,12.05 102.58,10.79 102.93,10.43 105.74,10.43 106.27,10.96 108.93,10.96 v109.54,11.57
P0.01
  Top 0.203: JP8.2 61.05,10.67 60.81,10.91 60.81,12.69 60.4,13.09 60.4,14.88 61.37,15.85 61.37,16.14 62.51,17.27 U3.4
P0.02
  Top 0.203: JP4.2 20.05,10.67 19.81,10.91 19.81,12.69 19.4,13.09 19.4,14.88 20.37,15.85 20.37,16.14 21.51,17.27 U2.4
P0.03
  Top 0.203: JP4.3 22.59,8.6 20.14,11.05 20.14,12.83 19.74,13.23 19.74,14.58 20.79,15.63 20.79,15.99 21.67,16.87 U2.5
P0.04
  Top 0.203: JP4.4 24.03,8.3 23,9.32 22.35,9.32 20.48,11.19 20.48,12.96 20.07,13.37 20.07,14.44 21.12,15.49 21.12,15.76 21.84,16.47 U2.6
P0.05
  Top 0.203: JP4.5 26.57,8.3 25.21,9.66 22.6,9.66 20.81,11.44 20.81,13.1 20.41,13.51 20.41,14.3 21.46,15.35 21.46,15.6 21.93,16.07 U2.7
P0.06
  Top 0.203: U3.43 66.18,22.24 66.08,22.34 65.58,22.34 65.24,22.68 63.18,22.68 62.16,23.7 JP7.2
P0.07
  Top 0.203: JP7.3 64.7,23.7 65.72,22.68 66.22,22.68 66.58,22.31 U3.42
P0.08
  Top 0.203: JP7.4 66.98,22.85 U3.41
P0.09
  Top 0.203: JP7.5 67.38,22.41 U3.40
P0.10
  Top 0.203: JP8.3 63.59,8.6 61.14,11.05 61.14,12.83 60.74,13.23 60.74,14.58 61.79,15.63 61.79,15.99 62.67,16.87 U3.5
P0.11
  Top 0.203: JP8.4 65.03,8.3 64,9.32 63.35,9.32 61.48,11.19 61.48,12.96 61.07,13.37 61.07,14.44 62.12,15.49 62.12,15.76 62.84,16.47 U3.6
P0.12
  Top 0.203: JP8.5 67.57,8.3 66.21,9.66 63.6,9.66 61.81,11.44 61.81,13.1 61.41,13.51 61.41,14.3 62.46,15.35 62.46,15.6 62.93,16.07 U3.7
P0.13
  Top 0.203: JP12.2 102.05,10.67 101.81,10.91 101.81,12.69 101.4,13.09 101.4,14.88 102.37,15.85 102.37,16.14 103.5,17.27 U5.4
P0.14
  Top 0.203: U5.43 107.18,22.24 107.08,22.34 106.58,22.34 106.24,22.68 104.18,22.68 103.15,23.7 JP11.2
P0.15
  Top 0.203: JP11.3 105.69,23.7 106.72,22.68 107.22,22.68 107.58,22.31 U5.42
P0.16
  Top 0.203: JP11.4 107.98,22.85 U5.41
P0.17
  Top 0.203: JP11.5 108.38,22.41 U5.40
P0.18
  Top 0.203: JP12.3 104.59,8.6 102.14,11.05 102.14,12.83 101.73,13.23 101.73,14.58 102.79,15.63 102.79,15.99 103.67,16.87 U5.5
P0.19
  Top 0.203: JP12.4 106.02,8.3 105,9.32 104.34,9.32 102.48,11.19 102.48,12.96 102.07,13.37 102.07,14.44 103.12,15.49 103.12,15.76 103.84,16.47 U5.6
P0.20
  Top 0.203: JP12.5 108.56,8.3 107.21,9.66 104.6,9.66 102.81,11.44 102.81,13.1 102.4,13.51 102.4,14.3 103.46,15.35 103.46,15.6 103.93,16.07 U5.7
P0.28
  Top 0.203: JP3.5 26.38,22.41 U2.40
P0.29
  Top 0.203: JP3.4 25.98,22.85 U2.41
P0.30
  Top 0.203: JP3.3 23.7,23.7 24.72,22.68 25.22,22.68 25.58,22.31 U2.42
P0.31
  Top 0.203: U2.43 25.18,22.24 25.08,22.34 24.58,22.34 24.24,22.68 22.18,22.68 21.16,23.7 JP3.2
RF-1
  Top 0.254: U2.30 28.89,16.07
  Top 0.406: 28.89,16.07 30.66,16.07 C15.1 31.49,16.81 L1.1
RF-2
  Top 0.406: L1.2 33,18.29 | 33,18.29 C16.1 | U$1.RF 33.85,19.15 33,18.29
RF-3
  Top 0.406: L2.2 74,18.29 | 74,18.29 C33.1 | U$2.RF 74.85,19.15 74,18.29
RF-4
  Top 0.254: U3.30 69.89,16.07
  Top 0.406: 69.89,16.07 71.66,16.07 C32.1 72.49,16.81 L2.1
RF-5
  Top 0.406: L3.2 114.99,18.29 | 114.99,18.29 C51.1 | U$3.RF 115.85,19.15 114.99,18.29
RF-6
  Top 0.254: U5.30 110.89,16.07
  Top 0.406: 110.89,16.07 112.66,16.07 C50.1 113.49,16.81 L3.1
SWDCLK  (via drill 0.2)
  Top 0.203: v30.08,13.35 29.36,14.07 U2.25
  Bottom 0.203: TC1.4 32.24,11.19 v30.08,13.35
  other vias: 32.37,11.19
SWDCLK1  (via drill 0.2)
  Top 0.203: v71.08,13.35 70.36,14.07 U3.25
  Bottom 0.203: TC2.4 73.24,11.19 v71.08,13.35
  other vias: 73.37,11.19
SWDCLK2  (via drill 0.2)
  Top 0.203: v112.08,13.35 111.36,14.07 U5.25
  Bottom 0.203: TC3.4 114.24,11.19 v112.08,13.35
  other vias: 114.37,11.19
SWDIO  (via drill 0.2)
  Top 0.203: v30.59,13.98 30.11,14.47 U2.26
  Bottom 0.203: v30.59,13.98 30.59,13.74 31.87,12.46 TC1.2
  other vias: 32.37,12.46
SWDIO1  (via drill 0.2)
  Top 0.203: v71.59,13.98 71.11,14.47 U3.26
  Bottom 0.203: v71.59,13.98 71.59,13.74 72.87,12.46 TC2.2
  other vias: 73.37,12.46
SWDIO2  (via drill 0.2)
  Top 0.203: v112.59,13.98 112.1,14.47 U5.26
  Bottom 0.203: v112.59,13.98 112.59,13.74 113.87,12.46 TC3.2
  other vias: 114.37,12.46
SWO  (via drill 0.2)
  Top 0.203: U2.21 26.38,11.59 27.8,10.17 v29.19,10.17
  Bottom 0.203: v29.19,10.17 32.12,10.17 TC1.6
  other vias: 32.37,9.92
SWO1  (via drill 0.2)
  Top 0.203: U3.21 67.38,11.59 68.8,10.17 v70.19,10.17
  Bottom 0.203: v70.19,10.17 73.12,10.17 TC2.6
  other vias: 73.37,9.92
SWO2  (via drill 0.2)
  Top 0.203: U5.21 108.38,11.59 109.8,10.17 v111.19,10.17
  Bottom 0.203: v111.19,10.17 114.11,10.17 TC3.6
  other vias: 114.37,9.92
UART_RX  (via drill 0.2)
  Top 0.203: U1.8 9.38,9.55 9.36,9.57 9.36,10.2 v9.13,10.43 10.05,10.43 10.29,10.66 12.28,10.66 v12.56,10.94 | U2.10 21.93,14.87 21.57,14.52 v21.57,14.24
  Bottom 0.203: v9.13,10.43 8.37,10.43 7.95,10.84 7.95,13.42 7.62,13.75 5.43,13.75 5.19,13.98 5.19,19.06 4.45,19.81 JP1.4 | v12.56,10.94 14.08,10.94 17.48,14.34 21.47,14.34 v21.57,14.24
UART_RX1  (via drill 0.2)
  Top 0.203: U4.8 50.38,9.55 50.36,9.57 50.36,10.2 v50.13,10.43 51.05,10.43 51.29,10.66 53.28,10.66 v53.56,10.94 | U3.10 62.93,14.87 62.57,14.52 v62.57,14.24
  Bottom 0.203: v50.13,10.43 49.37,10.43 48.95,10.84 48.95,13.42 48.62,13.75 46.43,13.75 46.19,13.98 46.19,19.06 45.45,19.81 JP5.4 | v53.56,10.94 55.08,10.94 58.49,14.34 62.47,14.34 v62.57,14.24
UART_RX2  (via drill 0.2)
  Top 0.203: U6.8 91.38,9.55 91.36,9.57 91.36,10.2 v91.13,10.43 92.05,10.43 92.28,10.66 94.28,10.66 v94.56,10.94 | U5.10 103.92,14.87 103.57,14.52 v103.57,14.24
  Bottom 0.203: v91.13,10.43 90.37,10.43 89.95,10.84 89.95,13.42 89.62,13.75 87.43,13.75 87.19,13.98 87.19,19.06 86.45,19.81 JP9.4 | v94.56,10.94 96.08,10.94 99.48,14.34 103.47,14.34 v103.57,14.24
UART_TX  (via drill 0.2)
  Top 0.203: v5.06,13.35 5.06,16.63 4.43,17.27 JP1.3 | U1.9 9.89,8.54 v9.89,9.79 10.42,10.33 11.9,10.33 12.05,10.17 v12.56,10.17 | v20.94,13.73 21.04,13.83 21.04,14.46 21.79,15.21 21.79,15.41 22.05,15.67 U2.8
  Bottom 0.203: v9.89,9.79 7.49,9.79 5.06,12.22 v5.06,13.35 | v12.56,10.17 14.52,10.17 18.08,13.73 v20.94,13.73
UART_TX1  (via drill 0.2)
  Top 0.203: v46.06,13.35 46.06,16.63 45.43,17.27 JP5.3 | U4.9 50.89,8.54 v50.89,9.79 51.42,10.33 52.9,10.33 53.05,10.17 v53.56,10.17 | v61.94,13.73 62.04,13.83 62.04,14.46 62.8,15.21 62.8,15.41 63.05,15.67 U3.8
  Bottom 0.203: v50.89,9.79 48.49,9.79 46.06,12.22 v46.06,13.35 | v53.56,10.17 55.52,10.17 59.08,13.73 v61.94,13.73
UART_TX2  (via drill 0.2)
  Top 0.203: v87.06,13.35 87.06,16.63 86.43,17.27 JP9.3 | U6.9 91.89,8.54 v91.89,9.79 92.42,10.33 93.9,10.33 94.05,10.17 v94.56,10.17 | v102.94,13.73 103.04,13.83 103.04,14.46 103.79,15.21 103.79,15.41 104.05,15.67 U5.8
  Bottom 0.203: v91.89,9.79 89.49,9.79 87.06,12.22 v87.06,13.35 | v94.56,10.17 96.52,10.17 100.08,13.73 v102.94,13.73
USB_IN  (via drill 0.35)
  Top 0.305: D2.5 9.64,13.98 9.51,13.86 7.6,13.86 7.58,13.88
  Top 0.406: v7.86,19.83 7.4,20.28 D1.A | J1.VBUS 7.58,13.88 7.6,13.91 v7.6,14.87
  Bottom 0.406: v7.86,19.83 7.6,19.57 v7.6,14.87
USB_IN1  (via drill 0.35)
  Top 0.305: D9.5 50.64,13.98 50.51,13.86 48.61,13.86 48.58,13.88
  Top 0.406: v48.86,19.83 48.4,20.28 D7.A | J2.VBUS 48.58,13.88 48.6,13.91 v48.6,14.87
  Bottom 0.406: v48.86,19.83 48.6,19.57 v48.6,14.87
USB_IN2  (via drill 0.35)
  Top 0.305: D15.5 91.64,13.98 91.51,13.86 89.6,13.86 89.58,13.88
  Top 0.406: v89.86,19.83 89.4,20.28 D13.A | J3.VBUS 89.58,13.88 89.6,13.91 v89.6,14.87
  Bottom 0.406: v89.86,19.83 89.6,19.57 v89.6,14.87
USB_N
  Top 0.203: J1.D- 7.03,15.83 7.95,15.83 8.69,15.1 D2.4 8.69,15.07 9.41,15.79 9.89,15.79 10.59,15.1 D2.6 10.59,14.3 9.88,13.6 U1.2
USB_N1
  Top 0.203: J2.D- 48.03,15.83 48.95,15.83 49.69,15.1 D9.4 49.69,15.07 50.41,15.79 50.89,15.79 51.59,15.1 D9.6 51.59,14.3 50.88,13.6 U4.2
USB_N2
  Top 0.203: J3.D- 89.03,15.83 89.95,15.83 90.69,15.1 D15.4 90.69,15.07 91.41,15.79 91.89,15.79 92.59,15.1 D15.6 92.59,14.3 91.88,13.6 U6.2
USB_P
  Top 0.203: J1.D+ 7.03,16.17 7.95,16.17 8.69,16.9 D2.3 8.69,16.97 9.38,16.27 9.89,16.27 10.59,16.97 | 10.59,16.97 D2.1 | U1.1 10.38,13.62 10.67,13.91 10.94,13.91 11.07,14.05 11.07,16.48 10.59,16.97
USB_P1
  Top 0.203: J2.D+ 48.03,16.17 48.95,16.17 49.69,16.9 D9.3 49.69,16.97 50.38,16.27 50.89,16.27 51.59,16.97 | 51.59,16.97 D9.1 | U4.1 51.38,13.62 51.67,13.91 51.94,13.91 52.08,14.05 52.08,16.48 51.59,16.97
USB_P2
  Top 0.203: J3.D+ 89.03,16.17 89.95,16.17 90.69,16.9 D15.3 90.69,16.97 91.38,16.27 91.89,16.27 92.59,16.97 | 92.59,16.97 D15.1 | U6.1 92.38,13.62 92.67,13.91 92.94,13.91 93.07,14.05 93.07,16.48 92.59,16.97
VCCIO  (via drill 0.2)
  Top 0.305: v11.67,18.3 11.67,11.44 11.29,11.06 7.1,11.06 | JP1.1 4.95,12.19 6.08,11.06 7.1,11.06 | 7.1,11.06 C12.1 7.66,9.07 8.13,9.54 8.62,9.54 8.88,9.28 U1.7
  Bottom 0.305: JP2.2 v11.67,18.3
VCCIO1  (via drill 0.2)
  Top 0.305: v52.67,18.3 52.67,11.44 52.29,11.06 48.1,11.06 | JP5.1 45.95,12.19 47.08,11.06 48.1,11.06 | 48.1,11.06 C35.1 48.66,9.07 49.13,9.54 49.62,9.54 49.88,9.28 U4.7
  Bottom 0.305: JP6.2 v52.67,18.3
VCCIO2  (via drill 0.2)
  Top 0.305: v93.67,18.3 93.67,11.44 93.29,11.06 89.1,11.06 | JP9.1 86.95,12.19 88.08,11.06 89.1,11.06 | 89.1,11.06 C53.1 89.66,9.07 90.13,9.54 90.62,9.54 90.88,9.28 U6.7
  Bottom 0.305: JP10.2 v93.67,18.3

## Text on the board
tPlace: 3V3 / / P.31 / / P.30 / / P.29 / / P.28 | 3V3 / / P.31 / / P.30 / / P.29 / / P.28 | 3V3 / / P.31 / / P.30 / / P.29 / / P.28 | RST | RST | RST | GND / / P.02 / / P.03 / / P.04 / / P.05 | GND / / P.02 / / P.03 / / P.04 / / P.05 | GND / / P.02 / / P.03 / / P.04 / / P.05